# Altium PCB Co1n1oT.PcbDoc (part 1 of 3)
Units mil, origin at the board's own origin, x right, y up, seen from the top; angles counter-clockwise.
Board outline 3740.16 x 2559.06 mil, 4 copper layers (Top Layer, GroundPlane, PowerPlane, Bottom Layer), stack 58.4 mil thick; 129 components, 105 nets, 410 pads, 365 vias.
Unrouted connection lines stored in the file: 18.
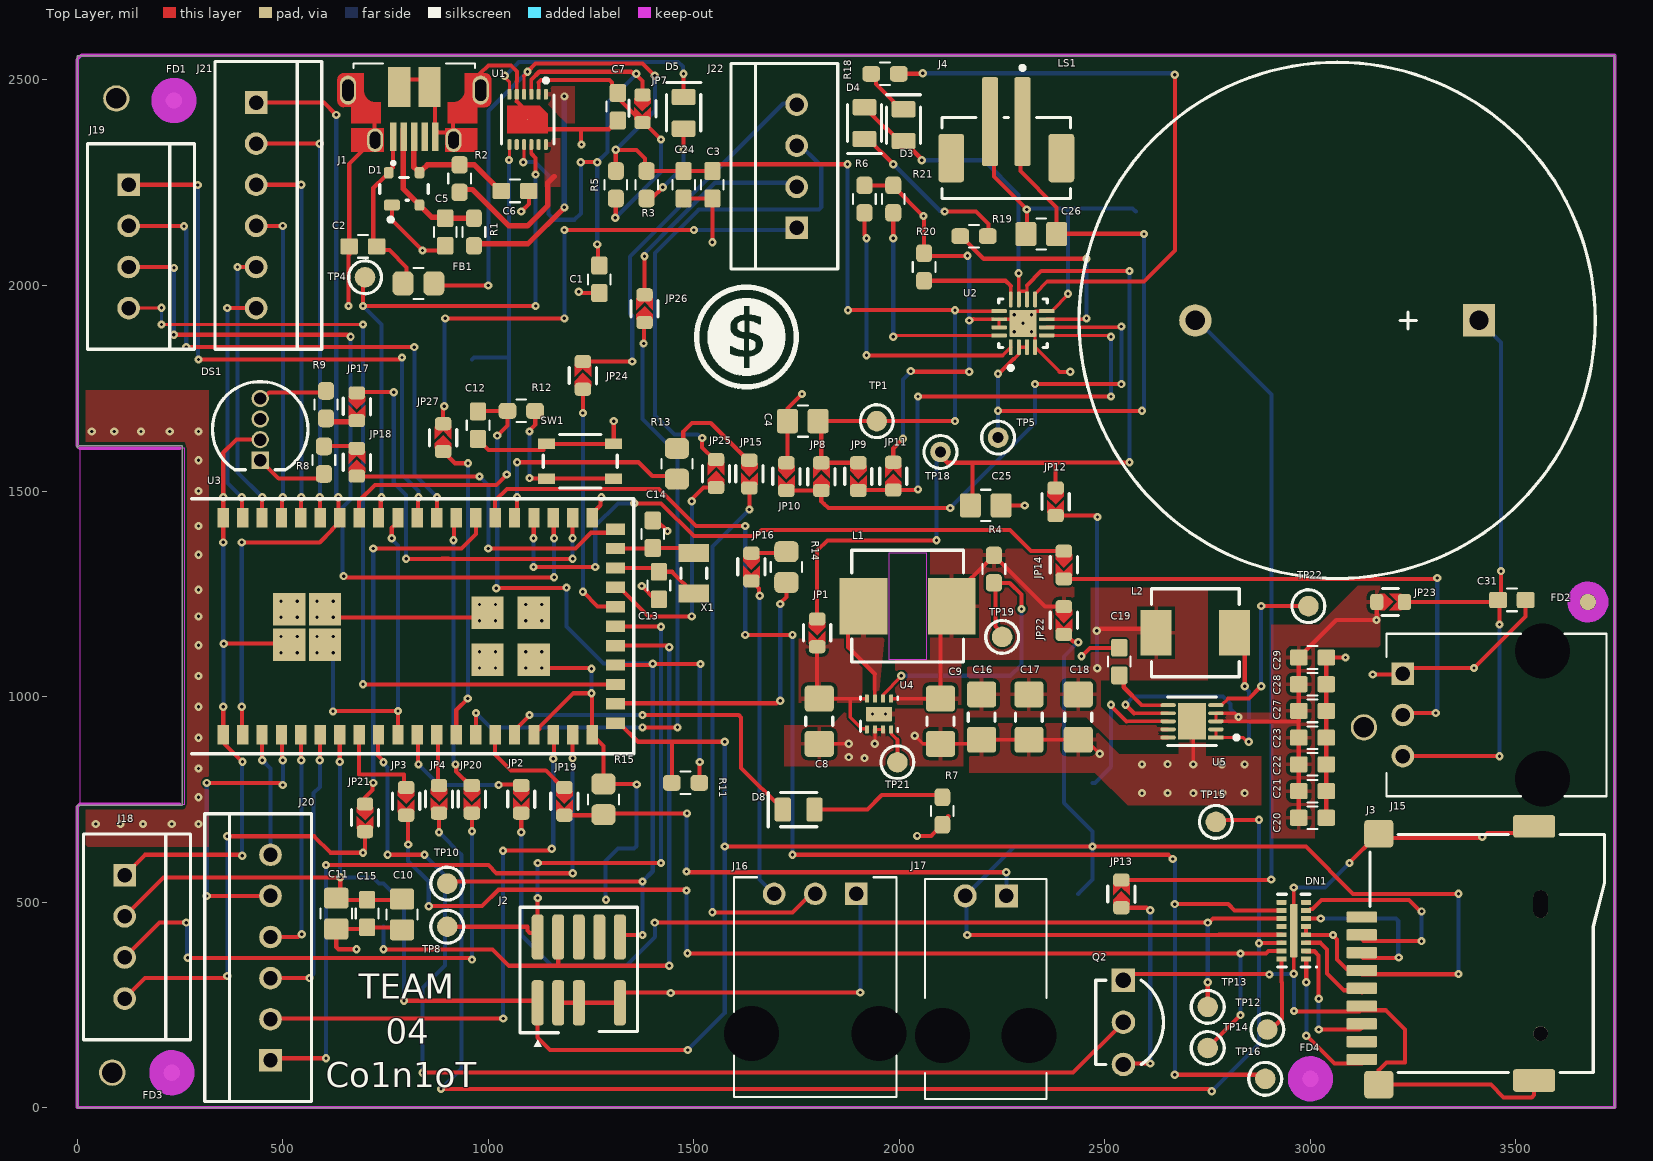
[diagram p0: Top Layer view]
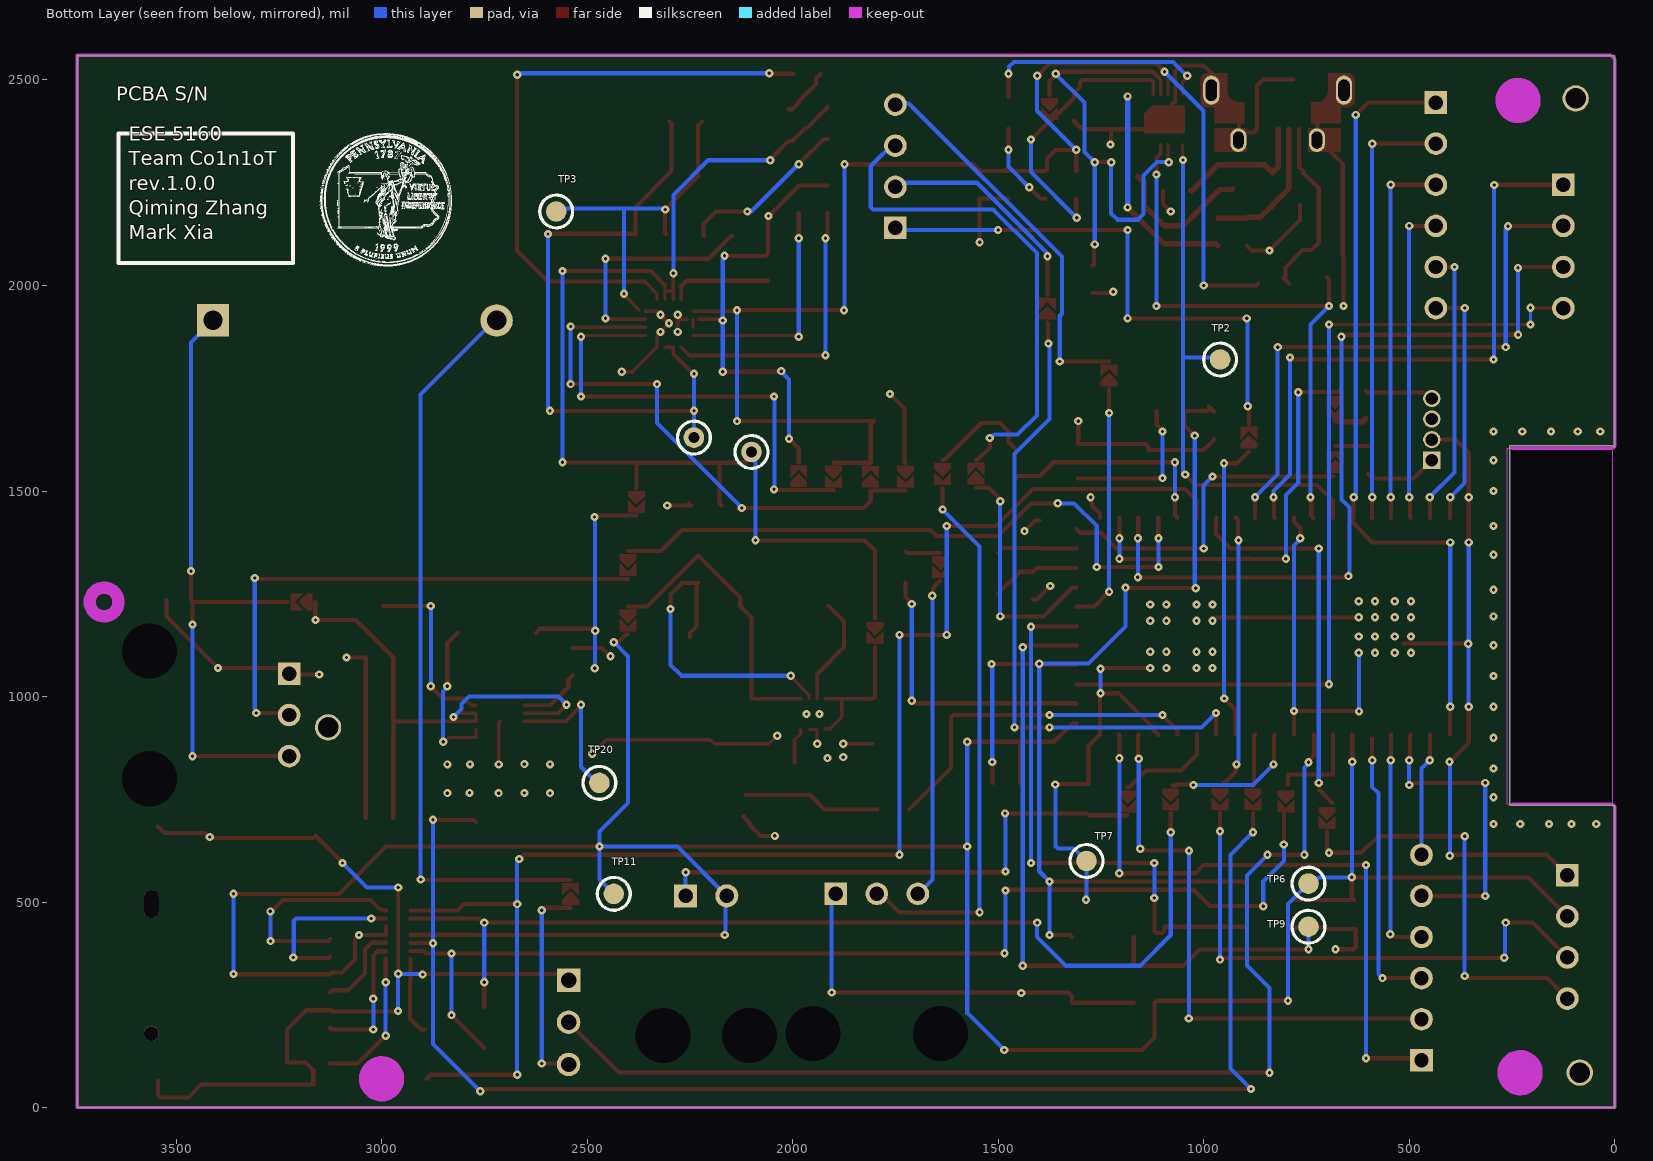
[diagram p1: Bottom Layer view, seen from below]
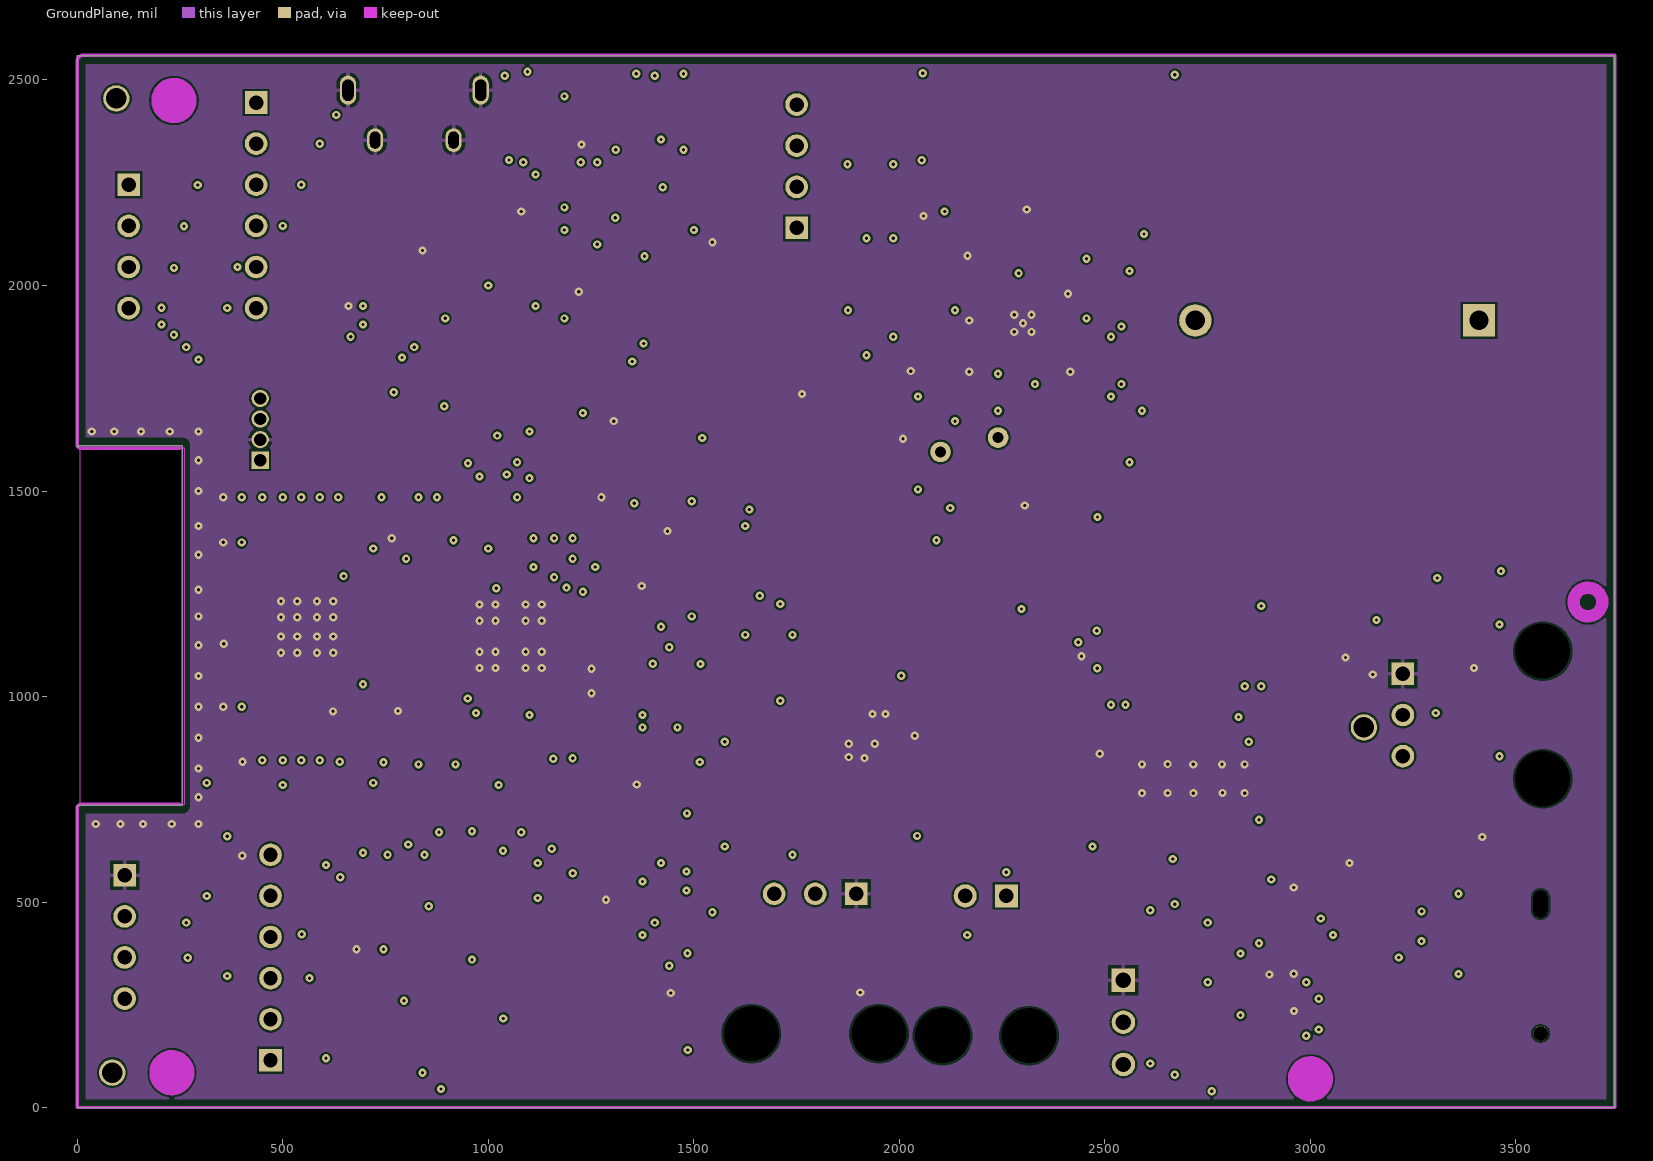
[diagram p2: GroundPlane]
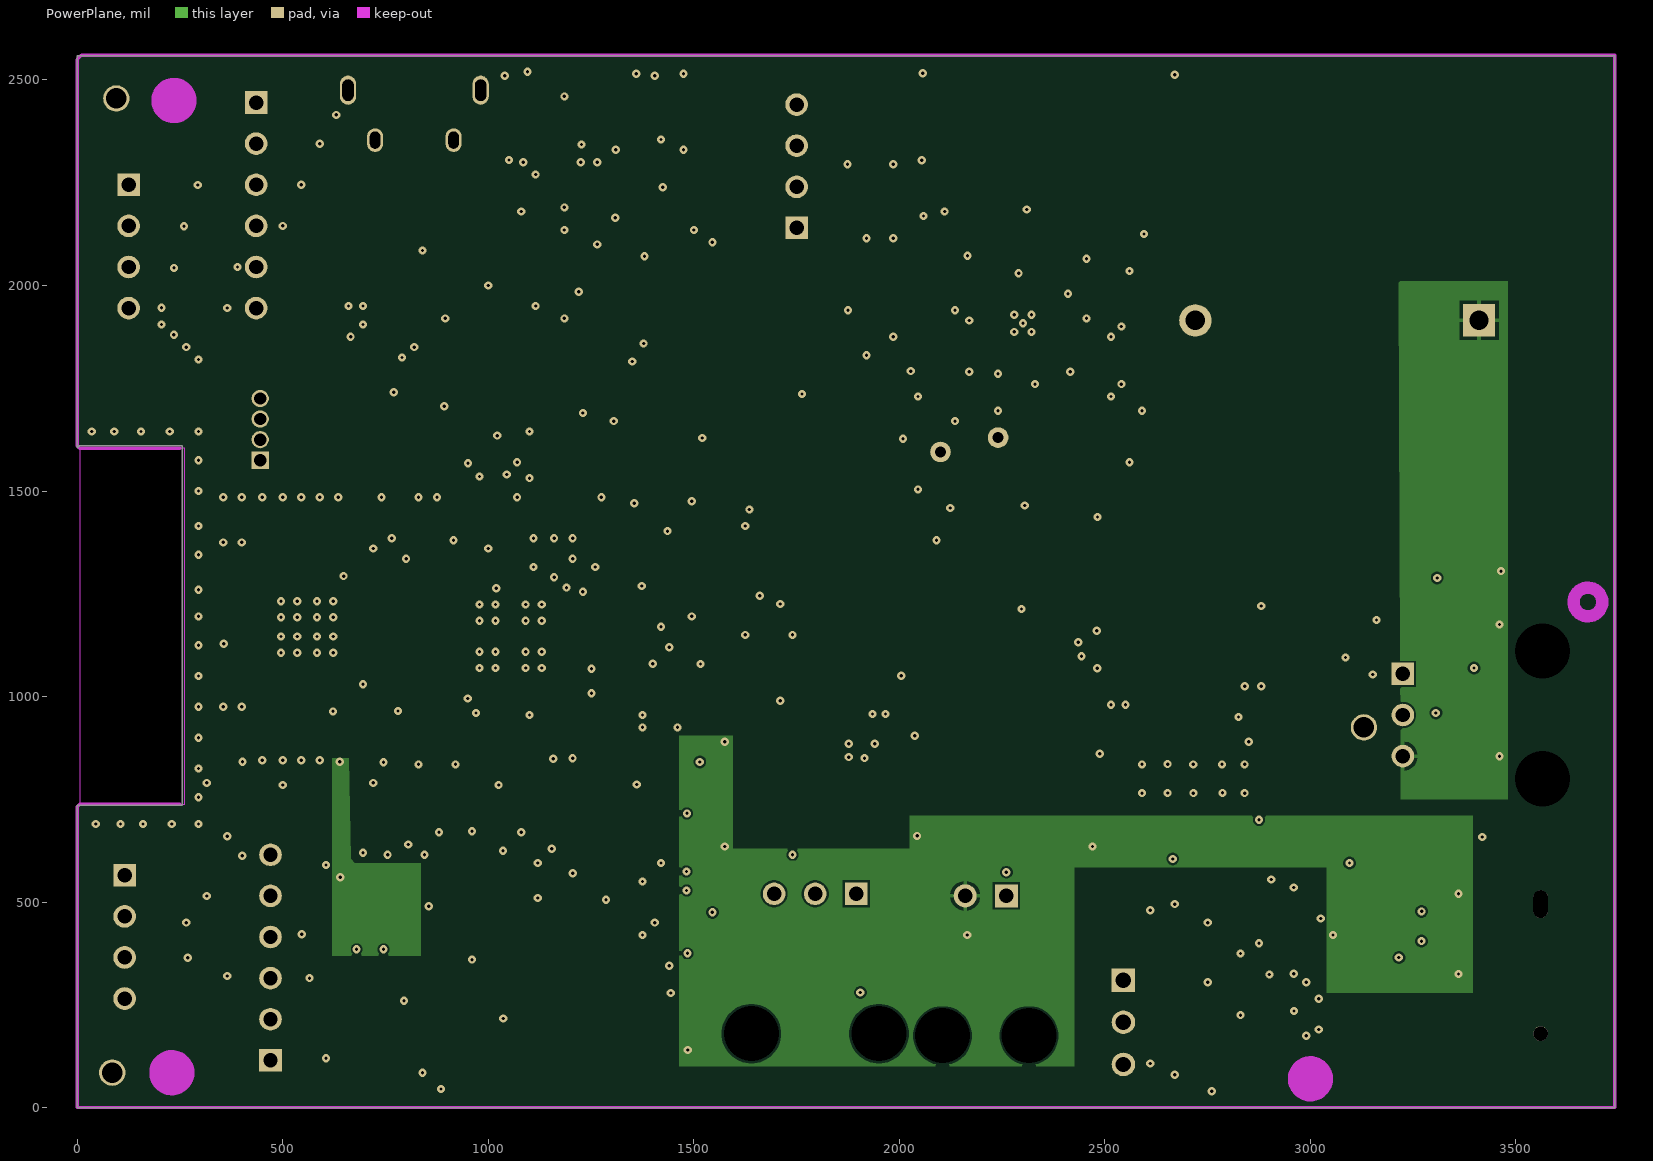
[diagram p3: PowerPlane]
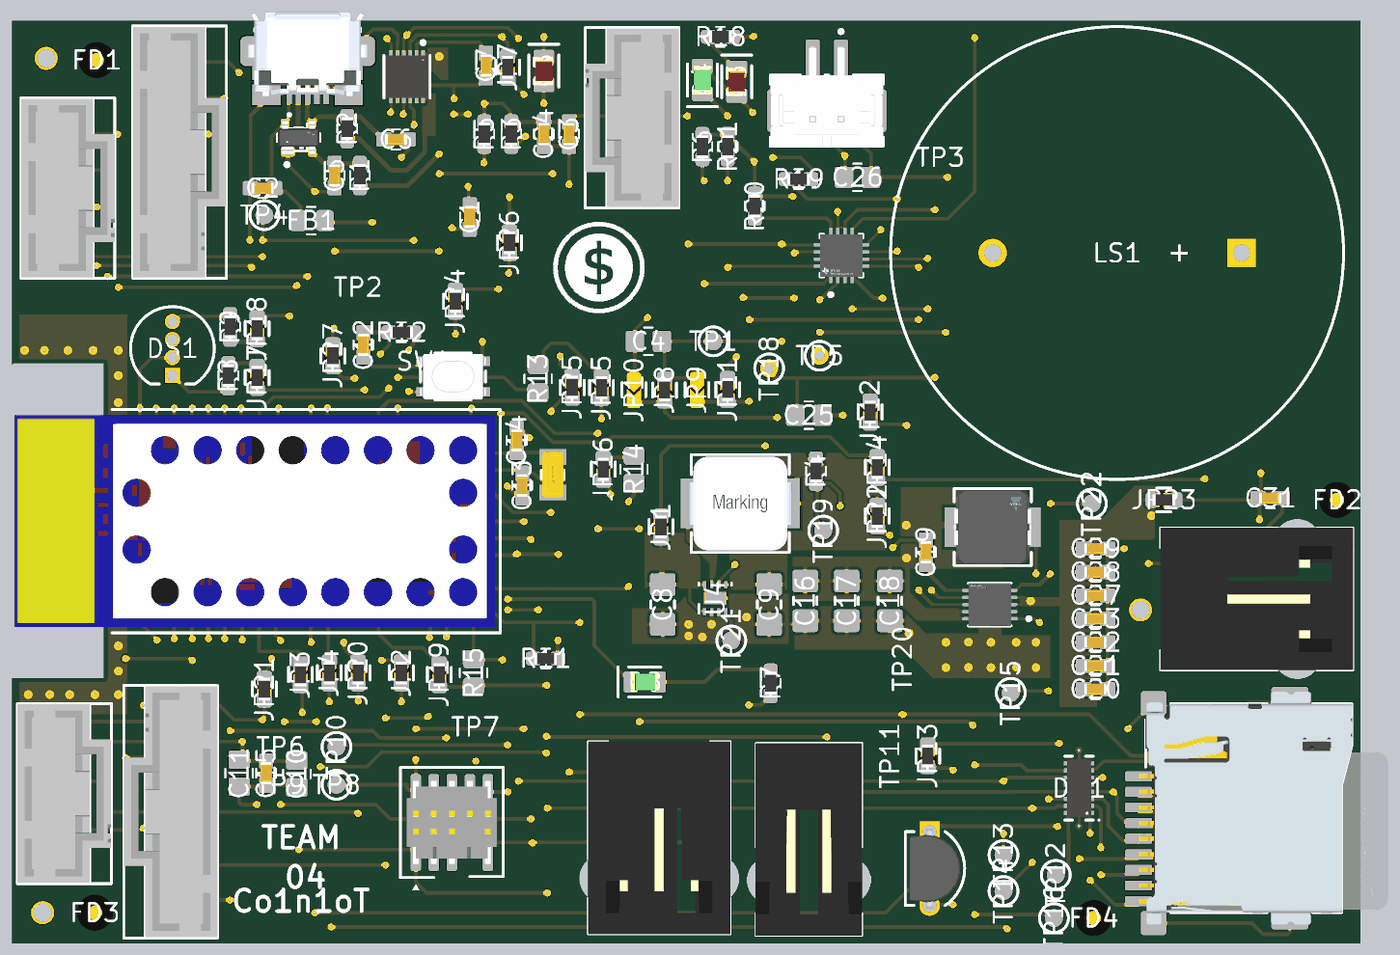
[diagram p5: 3D render of the assembled board from above, using the file's embedded part models]

## Layer stack, top to bottom
Top Solder: solder mask 1, Solder Resist, Dk 3.5
Top Layer: signal copper 1.5
Dielectric1: prepreg 13, PP-006, Dk 4.1
GroundPlane: signal copper 0.7
Dielectric 2: core 28, Core-009, Dk 4.5
PowerPlane: signal copper 0.7
Dielectric 3: prepreg 13, PP-006, Dk 4.1
Bottom Layer: signal copper 1.5
Bottom Solder: solder mask 1, Solder Resist, Dk 3.5

## Board outline
0,1605 5,1610 255,1610 255,735 0,735 0,0 3740.16,0 3740.16,2559.06 0,2559.06

## Design rules (kind name [scope] priority, off if disabled: settings)
AcuteAngle [All] p1: minimum=6.00000000000000E+0001 checktracksonly=TRUE
AssemblyTestPointUsage [All] p1 off: allowmultiple=TRUE
AssemblyTestpoint [All] p1 off: testpointundercomponent=TRUE minsize=30 maxsize=100 preferedsize=60 minholesize=0 maxholesize=40 preferedholesize=32 testpointgrid=1 usegrid=FALSE gridtolerance=0.01 allowsidebottom=TRUE
BoardOutlineClearance "BoardOutlineClearance_Inner Layer" [OnLayer('GroundPlane')OR OnLayer('PowerPlane')] p1: gap=20 ignorepadtopadclearanceinfootprint=FALSE
BoardOutlineClearance BoardOutlineClearance_OuterLayers [All] p2: gap=10 ignorepadtopadclearanceinfootprint=FALSE except(20: SMDPad-OutlineEdge SMDPad-CavityEdge SMDPad-CutoutEdge THPad-OutlineEdge THPad-CavityEdge THPad-CutoutEdge)
Clearance [All] p1: gap=5 ignorepadtopadclearanceinfootprint=FALSE except(10: SMDPad-THPad)
DiffPairsRouting [InDifferentialPairClass('USB')] p1: maxlimit=10 minlimit=6 mostfreqgap=10 toplayer_maxgap=6 toplayer_prefgap=6 toplayer_minwidth=13.15 toplayer_maxwidth=13.15 toplayer_prefwidth=13.15 midlayer1_minwidth=15 midlayer1_maxwidth=15 midlayer1_prefwidth=15 midlayer2_minwidth=15 midlayer2_maxwidth=15 midlayer2_prefwidth=15 bottomlayer_maxgap=6 bottomlayer_prefgap=6 bottomlayer_minwidth=13.15 bottomlayer_maxwidth=13.15 bottomlayer_prefwidth=13.15 impedanceprofiledriven=TRUE maxuncoupledlength=500
FabricationTestPointUsage [All] p1 off: valid=0 allowmultiple=TRUE
FabricationTestpoint [All] p1 off: side=2 testpointundercomponent=TRUE minsize=30 maxsize=100 preferedsize=60 minholesize=0 maxholesize=40 preferedholesize=32 testpointgrid=1 allowsidebottom=TRUE usegrid=FALSE gridtolerance=0.01
HoleSize [All] p1: absolutevalues=TRUE maxlimit=150 minlimit=7.87 maxpercent=80.000 minpercent=20.000
MinimumAnnularRing [All] p1: minimumring=5.91
MinimumSolderMaskSliver [All] p1: minsoldermaskwidth=2
PlaneClearance [All] p1: clearance=10
PlaneConnect [All] p1: pad.planeconnectstyle=Relief pad.reliefexpansion=20 pad.reliefentries=4 pad.reliefconductorwidth=10 pad.reliefairgap=10 via.planeconnectstyle=Direct via.reliefexpansion=20 via.reliefentries=4 via.reliefconductorwidth=10 via.reliefairgap=10
PolygonConnect [All] p1: thpad.connectstyle=Relief thpad.reliefconductorwidth=10 thpad.reliefentries=4 thpad.polygonreliefangle="90 Angle" thpad.airgapwidth=8 smdpad.connectstyle=Relief smdpad.reliefconductorwidth=10 smdpad.reliefentries=4 smdpad.polygonreliefangle="90 Angle" smdpad.airgapwidth=8 via.connectstyle=Direct via.reliefconductorwidth=10 via.reliefentries=4 via.polygonreliefangle="90 Angle" via.airgapwidth=8
RoutingLayers [All] p1: top layer_v5=TRUE mid layer 1_v5=FALSE mid layer 2_v5=FALSE bottom layer_v5=TRUE
RoutingVias [All] p1: holewidth=7.87 width=19.68 viastyle="Through Hole" minholewidth=7.87 minwidth=19.68 maxholewidth=30 maxwidth=50
SMDNeckDown SMDNeckDown_USB [InNet('USB_FTDI_DATA_6_P') or InNet('USB_FTDI_DATA_6_N') or InNet('USB_DATA_N') or InNet('USB_DATA_P')] p1: percent=150.000
SMDNeckDown [All] p2: percent=90.000
SMDToCorner [All] p1: distance=0
SMDToPlane [All] p1: distance=0
SilkToSilkClearance [All] p1: silktosilkclearance=0
SilkToSolderMaskClearance [IsPad] p1: minsilkscreentomaskgap=2 clearancetoexposedcopper=TRUE
SolderMaskExpansion [All] p1: expansion=2 istentingtop=FALSE
UnRoutedNet [All] p1: checkbadconnections=TRUE
ViasUnderSMD [All] p1: allowed=FALSE
Width Width_Power [InNetClass('Power')] p1: maxlimit=50 minlimit=15 preferedwidth=15
Width [All] p2: maxlimit=50 minlimit=5 preferedwidth=10
17 further rules are at their usual default settings.

## Classes and differential pairs
differential pair class USB: USB_DATA USB_FTDI_DATA_5
net class USB: USB_DATA_N USB_DATA_P USB_FTDI_DATA_5_N USB_FTDI_DATA_5_P
component class U_Memory: C15 DN1 J3 TP11 TP12 TP13 TP14 TP15 TP16
component class U_MCU: C10 C11 C12 C13 C14 J2 J20 J21 R11 R12 SW1 TP6 TP7 TP8 TP9 TP10 U3 X1
component class U_LiPo_Charger: C24 C25 C26 D3 D4 JP8 JP9 JP10 JP11 R6 R18 R19 R20 R21 U2
component class U_FTDI: C1 C2 C3 C4 C5 C6 C7 D1 D5 FB1 JP7 R1 R2 R3 R5 U1
component class "TFT LCD 358": J22
component class "RED-GREEN STATUS RGB": DS1 R8 R9
component class Main: C31 D8 FD1 FD2 FD3 FD4 J1 J4 J15 J16 J17 J18 J19 JP1 JP2 JP3 JP4 JP12 JP13 JP14 JP15 JP16 JP17 JP18 JP19 JP20 JP21 JP22 JP23 JP24 JP25 JP26 JP27 LS1 Q2 R7 R13 R14 R15 TP1 TP2 TP3 TP4 TP5 TP18 TP19 TP20 TP21 TP22
component class "5V BOOST": C16 C17 C18 C19 C20 C21 C22 C23 C27 C28 C29 L2 U5
component class "3V3 BUCK": C8 C9 L1 R4 U4
differential pair USB_FTDI_DATA_5: +USB_FTDI_DATA_5_P -USB_FTDI_DATA_5_N
differential pair USB_DATA: +USB_DATA_P -USB_DATA_N

## Components (designator, comment, footprint, x,y, rotation, side; value= is the part's Value field where it differs from the comment)
C1 "0.1UF 16V" 0603_CAP 1270,2015 r90 top value=0.1UF
C2 "0.01uF 16V" 0603_CAP 695,2095 r0 top value=0.01UF
C3 "0.1UF 16V" 0603_CAP 1545,2245 r90 top value=0.1UF
C4 "4.7UF 16V" 0805_CAP 1765,1670 r0 top value=4.7UF
C5 "47pF 50V 5%" 0603_CAP 895,2130 r90 top value=47PF
C6 "47pF 50V 5%" 0603_CAP 1065,2230 r180 top value=47PF
C7 "0.1UF 16V" 0603_CAP 1315,2435 r90 top value=0.1UF
C8 "CAP 1206 10UF 16V 10% X7R" 1206_CAP 1805,940 r90 top value=10UF
C9 "CAP 1206 22UF 10V 10% X7R" 1206_CAP_75H 2100,940 r90 top value=22µF
C10 "10UF 16V" 0805_CAP_60H 790,470 r90 top value=10UF
C11 "10UF 16V" 0805_CAP_60H 630,472 r270 top value=10UF
C12 "1uF 16V" 0603_CAP 975,1660 r90 top value=1UF
C13 "18pF" 0603_CAP 1415,1270 r90 top value=18PF
C14 "18pF" 0603_CAP 1400,1395 r270 top value=18PF
C15 "0.1UF 16V" 0603_CAP 705,472 r90 top value=0.1UF
C16 "CAP 1206 10UF 16V 10% X7R" 1206_CAP 2200,950 r90 top value=10UF
C17 "CAP 1206 10UF 16V 10% X7R" 1206_CAP 2315,950 r90 top value=10UF
C18 "CAP 1206 10UF 16V 10% X7R" 1206_CAP 2435,950 r90 top value=10UF
C19 "CAP 0603 1500PF 50V 10% X7R" 0603_CAP 2535,1085 r270 top value=15nF
C20 "CAP 0603 4.7UF 10V 10% X5R" 0603_CAP 3005,705 r180 top value=4.7UF
C21 "CAP 0603 4.7UF 10V 10% X5R" 0603_CAP 3005,770 r180 top value=4.7UF
C22 "CAP 0603 4.7UF 10V 10% X5R" 0603_CAP 3005,835 r180 top value=4.7UF
C23 "CAP 0603 4.7UF 10V 10% X5R" 0603_CAP 3005,900 r180 top value=4.7UF
C24 "1uF 16V" 0603_CAP 1475,2245 r90 top value=1UF
C25 "4.7UF 16V" 0805_CAP 2210,1465 r180 top value=4.7UF
C26 "4.7UF 16V" 0805_CAP 2345,2125 r0 top value=4.7UF
C27 "CAP 0603 4.7UF 10V 10% X5R" 0603_CAP 3005,965 r180 top value=4.7UF
C28 "CAP 0603 4.7UF 10V 10% X5R" 0603_CAP 3005,1030 r180 top value=4.7UF
C29 "CAP 0603 4.7UF 10V 10% X5R" 0603_CAP 3005,1095 r180 top value=4.7UF
C31 "CAP 0603 10UF 16V 20% X5R" 0603_CAP 3490,1235 r180 top value=10UF
D1 "PRTR5V0U2X,215" FP-SOT143B-NXP 795,2235 r90 top
D3 "LSM0805412V" LED_0805_RED 2010,2390 r270 top
D4 "LSM0805452V" LED_0805 1915,2395 r90 top
D5 "LSM0805412V" LED_0805_RED 1475,2420 r270 top
D8 "LSM0805452V" LED_0805 1755,725 r0 top
DN1 "ECLAMP2410PQTCT" ECLAMP2410PQTCT-Footprint-1 2959.45,430.47 r180 top
DS1 "WP154A4SUREQBFZGC" KING-WP154A4SUREQBFZGC_V 445,1650 r180 top
FB1 "BLM21PG221SN1" 0805 830,2005 r0 top
FD1 "Fiducial 40x100mm" "Fiducial 40x100mm-Footprint-1" 235,2450 r0 top
FD2 "Fiducial 40x100mm" "Fiducial 40x100mm-Footprint-1" 3675,1230 r0 top
FD3 "Fiducial 40x100mm" "Fiducial 40x100mm-Footprint-1" 230,85 r0 top
FD4 "Fiducial 40x100mm" "Fiducial 40x100mm-Footprint-1" 3000,70 r0 top
J1 "10103592-0001LF" 10103592-0001LF-Footprint-1 820,2475 r180 top
J2 "ARM Cortex Debug" "FTSH-105-01-F-DV-007-K PLUGIN" 1220,335 r0 top
J3 "693071020811" 693071020811 3430,375 r90 top
J4 "B2B-PH-SM4-TBT(LF)(SN)" FP-B2B-PH-SM4-TBT_LF_SN-MFG 2260,2310 r180 top
J15 "5-103673-2" 5-103673-2-Footprint-1 3224.84,955.12 r270 top
J16 "5-103673-2" 5-103673-2-Footprint-1 1795.12,520.16 r180 top
J17 "5-103673-1" 5-103672-1-Footprint-1 2210.12,515.16 r180 top
J18 "5-104363-3" 5-104363-3-Footprint-1 115.28,415.28 r270 top
J19 "5-104363-3" 5-104363-3-Footprint-1 125,2095 r270 top
J20 "5-104363-5" 5-104363-5-Footprint-1 470,365 r90 top
J21 "5-104363-5" 5-104363-5-Footprint-1 435,2195 r270 top
J22 "5-104363-3" 5-104363-3-Footprint-1 1750,2290 r90 top
JP1 "0603 link" 0603_JP_RES 1800,1155 r90 top net-tie value=0.025
JP2 "0603 link" 0603_JP_RES 1080,750 r90 top net-tie value=0.025
JP3 "0603 link" 0603_JP_RES 800,745 r90 top net-tie value=0.025
JP4 "0603 link" 0603_JP_RES 880,750 r90 top net-tie value=0.025
JP7 "0603 link" 0603_JP_RES 1375,2430 r90 top net-tie value=0.025
JP8 "0603 link" 0603_JP_RES 1810,1535 r270 top net-tie value=0.025
JP9 "0603 link (Open)" 0603_JP_Open 1900,1535 r90 top value=10000000000meg
JP10 "0603 link (Open)" 0603_JP_Open 1725,1535 r90 top value=10000000000meg
JP11 "0603 link" 0603_JP_RES 1985,1536.25 r270 top net-tie value=0.025
JP12 "0603 link" 0603_JP_RES 2380,1473.75 r90 top net-tie value=0.025
JP13 "0603 link" 0603_JP_RES 2540,520 r270 top net-tie value=0.025
JP14 "0603 link" 0603_JP_RES 2400,1320 r90 top net-tie value=0.025
JP15 "0603 link" 0603_JP_RES 1635,1541.25 r90 top net-tie value=0.025
JP16 "0603 link" 0603_JP_RES 1640,1315 r90 top net-tie value=0.025
JP17 "0603 link" 0603_JP_RES 680,1570 r270 top net-tie value=0.025
JP18 "0603 link" 0603_JP_RES 680,1705 r90 top net-tie value=0.025
JP19 "0603 link" 0603_JP_RES 1185,745 r90 top net-tie value=0.025
JP20 "0603 link" 0603_JP_RES 960,750 r90 top net-tie value=0.025
JP21 "0603 link" 0603_JP_RES 700,705 r90 top net-tie value=0.025
JP22 "0603 link" 0603_JP_RES 2400,1185 r90 top net-tie value=0.025
JP23 "0603 link" 0603_JP_RES 3195,1230 r180 top net-tie value=0.025
JP24 "0603 link" 0603_JP_RES 1230,1781.25 r270 top net-tie value=0.025
JP25 "0603 link" 0603_JP_RES 1553.94,1542.5 r270 top net-tie value=0.025
JP26 "0603 link" 0603_JP_RES 1380,1943.75 r270 top net-tie value=0.025
JP27 "0603 link" 0603_JP_RES 890,1630 r270 top net-tie value=0.025
L1 "74437346010" WE-LHMI_7030 2020,1220 r0 top
L2 "IHLP2020BZER1R0M11" FP-IHLP-2020BZ-FP_1_905x2-MFG 2720,1155 r0 top
LS1 "AST-03208MR-R" AST-03208MR-R 3065,1915 r0 top locked
Q2 "2N4401TF" FP-135AR-MFG 2559.96,207.36 r0 top
R1 "RES 0603 27 1%" 0603_RES 965,2130 r270 top value=27
R2 "RES 0603 27 1%" 0603_RES 930,2260 r270 top value=27
R3 "RES 0603 1K 1%" 0603_RES 1385,2245 r270 top value=1k
R4 "RES 0603 178K 1%" 0603_RES 2230,1310 r270 top value=178k
R5 "RES 0603 1K 1%" 0603_RES 1310,2245 r270 top value=1k
R6 "RES 0603 1K 1%" 0603_RES 1915,2210 r270 top value=1k
R7 "RES 0603 1K 1%" 0603_RES 2104.43,721.54 r270 top value=1k
R8 "RES 0603 1K 1%" 0603_RES 600,1575 r90 top value=1k
R9 "RES 0603 1K 1%" 0603_RES 605,1710 r270 top value=1k
R11 "RES 0603 10K 1%" 0603_RES 1480,790 r180 top value=10k
R12 "RES 0603 100 1%" 0603_RES 1080,1695 r180 top value=100
R13 "RES 0805 470 1%" 0805_RES 1458.94,1566.25 r90 top value=470
R14 "RES 0805 470 1%" 0805_RES 1725,1315 r90 top value=470
R15 "RES 0805 47.5K 0.1%" 0805_RES 1280,750 r90 top value=47.5k
R18 "RES 0603 1K 1%" 0603_RES 1965,2515 r180 top value=1k
R19 "RES 0603 1K 1%" 0603_RES 2181.54,2120 r0 top value=1k
R20 "RES 0603 1.13K 1%" 0603_RES 2060,2045 r270 top value=1.13k
R21 "RES 0603 1.13K 1%" 0603_RES 1985,2210 r90 top value=1.13k
SW1 "PTS810SJK250SMTRLFS" PTS810SJK250SMTRLFS-Footprint-1 1141.61,1614.65 r0 top
TP1 "Testpad" "SMT Testpoint, 50mil" 1945,1670 r0 top
TP2 "Testpad" "SMT Testpoint, 50mil" 960,1820 r180 bottom
TP3 "Testpad" "SMT Testpoint, 50mil" 2575,2180 r180 bottom
TP4 "Testpad" "SMT Testpoint, 50mil" 700,2020 r0 top
TP5 "Testpad" "Test PTH 27-50" 2240,1630 r0 top
TP6 "Testpad" "SMT Testpoint, 50mil" 745,545 r180 bottom
TP7 "Testpad" "SMT Testpoint, 50mil" 1285,600 r180 bottom
TP8 "Testpad" "SMT Testpoint, 50mil" 900,440 r0 top
TP9 "Testpad" "SMT Testpoint, 50mil" 745,440 r180 bottom
TP10 "Testpad" "SMT Testpoint, 50mil" 900,545 r90 top locked
TP11 "Testpad" "SMT Testpoint, 50mil" 2435,520 r90 bottom
TP12 "Testpad" "SMT Testpoint, 50mil" 2895,190 r90 top
TP13 "Testpad" "SMT Testpoint, 50mil" 2750,245 r90 top
TP14 "Testpad" "SMT Testpoint, 50mil" 2750,145 r90 top
TP15 "Testpad" "SMT Testpoint, 50mil" 2770,695 r90 top
TP16 "Testpad" "SMT Testpoint, 50mil" 2890,70 r90 top
TP18 "Testpad" "Test PTH 27-50" 2100,1595 r90 top
TP19 "Testpad" "SMT Testpoint, 50mil" 2250,1145 r90 top
TP20 "Testpad" "SMT Testpoint, 50mil" 2470,790 r90 bottom
TP21 "Testpad" "SMT Testpoint, 50mil" 1995,840 r90 top
TP22 "Testpad" "SMT Testpoint, 50mil" 2995,1220 r90 top
U1 "FT234XD-R" FP-DFN-12-MFG 1095.71,2403.98 r270 top
U2 "BQ24075RGTR" FP-RGT0016C-IPC_A 2300.47,1907.99 r90 top
U3 "ATSAMW25H18-MR210" ATSAMW25H18-MR210-Footprint-1 803.83,1171.07 r90 top locked
U4 "TPS62082DSGR" DSG0008A_V 1950.47,957.4 r90 top
U5 "TPS61232DRCR" FP-DRC0010G-IPC_A 2711.81,939.68 r180 top
X1 "ABS07-32.768KHZ-T" FP-ABS07-MFG 1500,1300 r90 top

## Footprints (in the part's own frame and the unit in brackets; to place one, negate y for a bottom-side part, rotate by r counter-clockwise, add the part's x,y. Pads: shape width x height; smd on the part's side, far side on the other; paste and mask are expansions set on the pad)
5-103672-1-Footprint-1 [mil]
  rect 56x56 hole 35: 1(-50,0)
  round 56 hole 35: 2(50,0)
  round 0 hole 133.86 unplated mask+4: MH(-105.12,340.16) MH(105.12,340.16)
  silkscreen extent -147,-41 147,494, body extent -147,-41 147,494, height 260
5-103673-2-Footprint-1 [mm]
  rect 1.398x1.398 hole 0.89: 1(-2.54,0)
  round 1.398 hole 0.89: 2(0,0) 3(2.54,0)
  round 0 hole 3.4 unplated mask+0.102: MH(-3.94,8.64) MH(3.94,8.64)
  silkscreen extent -5.02,-1.02 5.02,12.57, body extent -5.02,-1.02 5.01,12.57, height 6.6
5-104363-3-Footprint-1 [mm]
  rect 1.398x1.398 hole 0.89: 1(-3.81,0)
  round 1.398 hole 0.89: 2(-1.27,0) 3(1.27,0) 4(3.81,0)
  silkscreen extent -6.35,-2.54 6.35,4.06, body extent -6.29,-2.54 6.29,4.06, height 13.59
5-104363-5-Footprint-1 [mm]
  rect 1.398x1.398 hole 0.89: 1(-6.35,0)
  round 1.398 hole 0.89: 2(-3.81,0) 3(-1.27,0) 4(1.27,0) 5(3.81,0) 6(6.35,0)
  silkscreen extent -8.89,-2.54 8.89,4.06, body extent -8.83,-2.54 8.83,4.06, height 13.59
0603_CAP [mm]
  rrect25% 1.1x1 smd: 1(-0.85,0) 2(0.85,0)
  silkscreen extent -0.3,-0.7 0.3,0.7, body extent -0.8,-0.4 0.8,0.4, height 0.6
0603_JP_Open [mil] "Jumper (Open/DNP)"
  rrect50% 32x40 smd paste-999: 1(33.75,0) 2(-33.75,0)
  Top Layer region: -26.25,0 -16.25,0 3.75,-20 -25.75,-20
  Top Layer region: -26.25,0 -16.25,0 3.75,20 -26.25,20
  Top Layer region: 26,20 13.75,20 -6.25,0 13.75,-20 26,-20
  silkscreen extent -19,-33 20,33
0603_JP_RES [mil] "Jumper (Resistor)"
  rrect50% 32x40 smd paste+1.5: 1(33.75,0) 2(-33.75,0)
  Top Layer region: -26.25,0 -16.25,0 3.75,-20 -25.75,-20
  Top Layer region: -26.25,0 -16.25,0 3.75,20 -26.25,20
  Top Layer region: 26,20 13.75,20 -6.25,0 13.75,-20 26,-20
  silkscreen extent -19,-33 20,33, body extent -31,-16 31,16, height 24
0603_RES [mil]
  rrect50% 43x39 smd: 1(-33.46,0) 2(33.46,0)
  silkscreen extent -12,-28 12,28, body extent -31,-16 32,16, height 24
0805 [mm] "Body 2.0 x 1.2 mm (LxW typ)"
  rrect50% 1.3x1.5 smd: 1(-0.95,0) 2(0.95,0)
  silkscreen extent -0.3,-0.97 0.3,0.97, body extent -1.15,-0.72 1.15,0.72, height 1.1
0805_CAP [mm]
  rrect25% 1.3x1.5 smd: 1(-0.95,0) 2(0.95,0)
  silkscreen extent -0.3,-0.97 0.3,0.97, body extent -1,-0.65 1,0.66, height 1.52
0805_CAP_60H [mm]
  rrect25% 1.3x1.5 smd: 1(-0.95,0) 2(0.95,0)
  silkscreen extent -0.3,-0.97 0.3,0.97, body extent -1,-0.65 1,0.66, height 1.52
0805_RES [mm]
  rrect50% 1.3x1.5 smd: 1(-0.95,0) 2(0.95,0)
  silkscreen extent -0.3,-0.97 0.3,0.97, body extent -1.09,-0.7 1.09,0.7, height 1.1
1206_CAP [mm]
  rrect25% 1.6x1.8 smd: 1(-1.4,0) 2(1.4,0)
  silkscreen extent -0.25,-0.83 0.25,0.83, body extent -1.6,-0.83 1.6,0.83, height 1.91
1206_CAP_75H [mm]
  rrect25% 1.6x1.8 smd: 1(-1.4,0) 2(1.4,0)
  silkscreen extent -0.25,-0.83 0.25,0.83, body extent -1.6,-0.83 1.6,0.83, height 1.91
10103592-0001LF-Footprint-1 [mm]
  rect 0.4x1.75 smd: 1(1.3,2.875) 2(0.65,2.875) 3(0,2.875) 4(-0.65,2.875) 5(-1.3,2.875)
  oval 1x1.8 hole 0.7 slot 1.326 at 90 deg: S1(-4.1,0) S3(4.1,0)
  oval 1x1.46 hole 0.65 slot 1.05 at 90 deg: S2(-2.425,3.08) S4(2.425,3.08)
  rect 1.375x2.5 smd: S5(-0.937,-0.2) S6(0.937,-0.2)
  Top Layer region: 3.9,2.35 1.9,2.35 1.9,3.81 3.9,3.81
  Top Layer region: 3.9,1.05 4.35,1.05 4.371,1.049 4.392,1.048 4.413,1.045 4.433,1.041 4.454,1.036 4.474,1.03 4.493,1.023 4.513,1.015 4.532,1.006 4.55,0.996 4.568,0.985 4.585,0.974 4.602,0.961 4.618,0.947 4.633,0.933 4.647,0.918 4.661,0.902 4.674,0.885 4.685,0.868 4.696,0.85 4.706,0.832 4.715,0.813 4.723,0.793 4.73,0.774 4.736,0.754 4.741,0.733 4.745,0.713 4.748,0.692 4.749,0.671 4.75,0.65 4.75,-0.65 4.749,-0.671 4.748,-0.692 4.745,-0.713 4.741,-0.733 4.736,-0.754 4.73,-0.774 4.723,-0.793 4.715,-0.813 4.706,-0.832 4.696,-0.85 4.685,-0.868 4.674,-0.885 4.661,-0.902 4.647,-0.918 4.633,-0.933 4.618,-0.947 4.602,-0.961 4.585,-0.974 4.568,-0.985 4.55,-0.996 4.532,-1.006 4.513,-1.015 4.493,-1.023 4.474,-1.03 4.454,-1.036 4.433,-1.041 4.413,-1.045 4.392,-1.048 4.371,-1.049 4.35,-1.05 3.125,-1.05 3.125,0 3.124,0.039 3.121,0.078 3.116,0.117 3.109,0.156 3.099,0.194 3.088,0.232 3.075,0.269 3.06,0.305 3.043,0.34 3.025,0.375 3.004,0.408 2.982,0.441 2.958,0.472 2.932,0.502 2.905,0.53 2.877,0.557 2.847,0.583 2.816,0.607 2.783,0.629 2.75,0.65 2.715,0.668 2.68,0.685 2.644,0.7 2.607,0.713 2.569,0.724 2.531,0.734 2.492,0.741 2.453,0.746 2.414,0.749 2.375,0.75 2.075,0.75 2.075,2.032 3.9,2.032
  Top Layer region: -1.9,2.35 -3.9,2.35 -3.9,3.81 -1.9,3.81
  Top Layer region: -2.075,0.75 -2.375,0.75 -2.414,0.749 -2.453,0.746 -2.492,0.741 -2.531,0.734 -2.569,0.724 -2.607,0.713 -2.644,0.7 -2.68,0.685 -2.715,0.668 -2.75,0.65 -2.783,0.629 -2.816,0.607 -2.847,0.583 -2.877,0.557 -2.905,0.53 -2.932,0.502 -2.958,0.472 -2.982,0.441 -3.004,0.408 -3.025,0.375 -3.043,0.34 -3.06,0.305 -3.075,0.269 -3.088,0.232 -3.099,0.194 -3.109,0.156 -3.116,0.117 -3.121,0.078 -3.124,0.039 -3.125,0 -3.125,-1.05 -4.35,-1.05 -4.371,-1.049 -4.392,-1.048 -4.413,-1.045 -4.433,-1.041 -4.454,-1.036 -4.474,-1.03 -4.493,-1.023 -4.513,-1.015 -4.532,-1.006 -4.55,-0.996 -4.568,-0.985 -4.585,-0.974 -4.602,-0.961 -4.618,-0.947 -4.633,-0.933 -4.647,-0.918 -4.661,-0.902 -4.674,-0.885 -4.685,-0.868 -4.696,-0.85 -4.706,-0.832 -4.715,-0.813 -4.723,-0.793 -4.73,-0.774 -4.736,-0.754 -4.741,-0.733 -4.745,-0.713 -4.748,-0.692 -4.749,-0.671 -4.75,-0.65 -4.75,0.65 -4.749,0.671 -4.748,0.692 -4.745,0.713 -4.741,0.733 -4.736,0.754 -4.73,0.774 -4.723,0.793 -4.715,0.813 -4.706,0.832 -4.696,0.85 -4.685,0.868 -4.674,0.885 -4.661,0.902 -4.647,0.918 -4.633,0.933 -4.618,0.947 -4.602,0.961 -4.585,0.974 -4.568,0.985 -4.55,0.996 -4.532,1.006 -4.513,1.015 -4.493,1.023 -4.474,1.03 -4.454,1.036 -4.433,1.041 -4.413,1.045 -4.392,1.048 -4.371,1.049 -4.35,1.05 -3.9,1.05 -3.9,2.032 -2.075,2.032
  silkscreen extent -3.75,-1.65 3.75,4.6, body extent -4.25,-2.75 4.25,3.23, height 2.77
693071020811 [mm] "Micro SD Card Connector Push & Push - with Card Detection - 8 Pins"
  rrect25% 0.7x1.9 smd: 1(2.25,7.75) 2(1.15,7.75) 3(0.05,7.75) 4(-1.05,7.75) 5(-2.15,7.75) 6(-3.25,7.75) 7(-4.35,7.75) 8(-5.45,7.75) 9(-6.55,7.75)
  rrect25% 1.7x1.8 smd: 10(-8.1,6.7) 11(7.4,6.7)
  rrect25% 1.4x2.6 smd: 12(-7.85,-2.9) 13(7.85,-2.9)
  round 0.9 hole 0.9 unplated: MH1(-4.95,-3.3)
  oval 1.7x0.9 hole 0.9 slot 1.7 at 0 deg unplated: MH2(3.05,-3.3)
  silkscreen extent -7.35,-7.25 7.35,7.25, body extent -8.2,-9.8 8.2,7.73, height 1.85
AST-03208MR-R [mm]
  rect 2x2 hole 1.2: 1(8.765,0)
  round 2 hole 1.2: 2(-8.765,0)
  silkscreen extent -15.95,-15.95 15.95,15.95, body extent -15.95,-15.95 16.78,15.95, height 14.12
ATSAMW25H18-MR210-Footprint-1 [mm]
  rect 1.2x0.7 smd mask+0.05: 1(-6.696,11.4) 2(-6.696,10.2) 3(-6.696,9) 4(-6.696,7.8) 5(-6.696,6.6) 6(-6.696,5.4) 7(-6.696,4.2) 8(-6.696,3) 9(-6.696,1.8) 10(-6.696,0.6) 11(-6.696,-0.6) 12(-6.696,-1.8) 13(-6.696,-3) 14(-6.696,-4.2) 15(-6.696,-5.4) 16(-6.696,-6.6) 17(-6.696,-7.8) 18(-6.696,-9) 19(-6.696,-10.2) 20(-6.696,-11.4) 32(6.704,-11.4) 33(6.704,-10.2) 34(6.704,-9) 35(6.704,-7.8) 36(6.704,-6.6) 37(6.704,-5.4) 38(6.704,-4.2) 39(6.704,-3) 40(6.704,-1.8) 41(6.704,-0.6) 42(6.704,0.6) 43(6.704,1.8) 44(6.704,3) 45(6.704,4.2) 46(6.704,5.4) 47(6.704,6.6) 48(6.704,7.8) 49(6.704,9) 50(6.704,10.2) 51(6.704,11.4)
  rect 0.7x1.2 smd mask+0.05: 21(-6,-12.841) 22(-4.8,-12.841) 23(-3.6,-12.841) 24(-2.4,-12.841) 25(-1.2,-12.841) 26(0,-12.841) 27(1.2,-12.841) 28(2.4,-12.841) 29(3.6,-12.841) 30(4.8,-12.841) 31(6,-12.841)
  rect 2x2 smd mask+0.05: EP(-2.082,-7.786) EP(-2.082,-4.931) EP(-1.134,5.107) EP(-1.134,7.325) EP(0.842,-4.931) EP(0.842,-7.786) EP(1.048,5.107) EP(1.048,7.325)
  Keep-Out Layer region: -11,13.775 11,13.775 11,20.275 -11,20.275
  silkscreen extent -7.87,-13.97 7.87,13.36, body extent -7.45,-13.6 7.45,20.26, height 3.37
DSG0008A_V [mm] "SON, 8-Leads, Body 2x2mm, Pitch 0.5mm, Thermal Pad 1.6x0.9mm, TI Recommended"
  rrect40% 0.5x0.25 smd: 1(-0.95,0.75) 2(-0.95,0.25) 3(-0.95,-0.25) 4(-0.95,-0.75) 5(0.95,-0.75) 6(0.95,-0.25) 7(0.95,0.25) 8(0.95,0.75)
  rrect11% 0.9x1.6 smd paste-0.45: 9(0,0)
  silkscreen extent -1.07,-1.15 1.07,1.15, body extent -1.05,-1.05 1.05,1.05, height 0.8
ECLAMP2410PQTCT-Footprint-1 [mm]
  rrect20% 0.63x0.3 smd mask+0: 1(-0.76,1.75) 2(-0.76,1.25) 3(-0.76,0.75) 4(-0.76,0.25) 5(-0.76,-0.25) 6(-0.76,-0.75) 7(-0.76,-1.25) 8(-0.76,-1.75) 9(0.76,-1.75) 10(0.76,-1.25) 11(0.76,-0.75) 12(0.76,-0.25) 13(0.76,0.25) 14(0.76,0.75) 15(0.76,1.25) 16(0.76,1.75)
  rrect20% 0.45x3.3 smd mask+0: EP(0,0)
  Top Layer lines w0.2: 0,2.667 0,0 0,-2.667
  silkscreen extent -1.45,-2.25 1,2.3, body extent -0.85,-2.05 0.85,2.05, height 0.65
"Fiducial 40x100mm-Footprint-1" [mil]
  round 40 smd paste-30 mask+30: 0(0,0)
  Keep-Out Layer circle w55: c0,0 r27.5
FP-135AR-MFG [mm]
  rect 1.45x1.45 hole 0.95 paste-1000 mask+0: 1(-0.38,2.6)
  round 1.45 hole 0.95 paste-1000 mask+0: 2(-0.38,0) 3(-0.38,-2.6)
  silkscreen extent -2.09,-2.6 2.09,2.6, body extent -2.19,-3.42 2.19,3.42, height 0.25
FP-ABS07-MFG [mm]
  rect 1.1x1.9 smd paste+0 mask+0: 1(-1.25,0) 2(1.25,0)
  silkscreen extent -0.33,-0.8 0.33,0.8, body extent -1.9,-1.05 1.9,1.05, height 0.25
FP-B2B-PH-SM4-TBT_LF_SN-MFG [mm]
  rrect25% 1x5.5 smd: 1(-1,-2.25) 2(1,-2.25)
  rrect25% 1.6x3 smd: S1(-3.4,0) S2(3.4,0)
  silkscreen extent -3.98,-5.7 3.98,2.5, body extent -3.98,-4.5 3.98,2.5, height 6.6
FP-DFN-12-MFG [mm]
  rrect50% 0.65x0.25 smd paste-0.025 mask+0: 1(-1.55,1.125) 2(-1.55,0.675) 3(-1.55,0.225) 4(-1.55,-0.225) 5(-1.55,-0.675) 6(-1.55,-1.125) 7(1.55,-1.125) 8(1.55,-0.675) 9(1.55,-0.225) 10(1.55,0.225) 11(1.55,0.675) 12(1.55,1.125)
  round 0.025 smd paste-0.05 mask+0: 13(0,0)
  Top Layer region: 0.85,-1.25 -0.85,-1.25 -0.85,0.74 -0.34,1.25 0.85,1.25
  silkscreen extent -2.52,-1.63 1.5,1.63, body extent -1.5,-1.5 1.5,1.5, height 0.81
FP-DRC0010G-IPC_A [mm]
  rect 0.956x0.239 smd paste+0 mask+0: 1(-1.478,1)
  rrect100% 0.956x0.239 smd paste+0 mask+0: 2(-1.478,0.5) 3(-1.478,0) 4(-1.478,-0.5) 5(-1.478,-1) 6(1.478,-1) 7(1.478,-0.5) 8(1.478,0) 9(1.478,0.5) 10(1.478,1)
  rect 1.7x2.25 smd paste-1000 mask+0: 11(0,0)
  silkscreen extent -2.88,-1.5 1.5,1.5, body extent -2.46,-2 2.46,2, height 0.25
FP-IHLP-2020BZ-FP_1_905x2-MFG [mm]
  rect 1.905x2.79 smd paste+0 mask+0: 1(-2.425,0) 2(2.425,0)
  silkscreen extent -2.72,-2.72 2.72,2.72, body extent -3.48,-2.82 3.48,2.82, height 0.25
FP-RGT0016C-IPC_A [mm]
  rrect50% 0.966x0.239 smd paste+0 mask+0: 1(-1.473,0.75) 2(-1.473,0.25) 3(-1.473,-0.25) 4(-1.473,-0.75) 9(1.473,-0.75) 10(1.473,-0.25) 11(1.473,0.25) 12(1.473,0.75)
  rrect50% 0.239x0.966 smd paste+0 mask+0: 5(-0.75,-1.473) 6(-0.25,-1.473) 7(0.25,-1.473) 8(0.75,-1.473) 13(0.75,1.473) 14(0.25,1.473) 15(-0.25,1.473) 16(-0.75,1.473)
  rrect6% 1.664x1.664 smd paste-1000 mask+0: EP(0,0)
  silkscreen extent -2.88,-1.5 1.5,1.5, body extent -2.46,-2.46 2.46,2.46, height 0.25
FP-SOT143B-NXP [mm]
  rrect50% 0.7x1 smd paste-0.1: 1(-1,0.75)
  rrect50% 0.7x0.6 smd paste-0.1: 2(-1,-0.95) 3(1,-0.95) 4(1,0.95)
  silkscreen extent -2.02,-1.5 0.7,1.5, body extent -1.16,-1.45 1.16,1.45, height 1.1
"FTSH-105-01-F-DV-007-K PLUGIN" [mil]
  rrect50% 29.13x109.84 smd: 1(-100,-80) 2(-100,80) 3(-50,-80) 4(-50,80) 5(0,-80) 6(0,80) 8(50,80) 9(100,-80) 10(100,80)
  silkscreen extent -143,-187 143,153, body extent -208,-310 207,115, height 315
KING-WP154A4SUREQBFZGC_V [mm] "THD, 4-Leads, Dia 5.9mm, Pitch 1.27mm"
  rect 1.07x1.07 hole 0.762 paste+0: 1(0,1.905)
  round 1.07 hole 0.762 paste+0: 2(0,0.635) 3(0,-0.635) 4(0,-1.905)
  silkscreen extent -2.95,-2.95 2.95,2.5
LED_0805 [mm] "Molded Diode, 2-Leads, Body 2.00x1.25mm, IPC Medium Density"
  rrect25% 1.01x1.47 smd: A(0.98,0) K(-0.98,0)
  silkscreen extent -1.88,-1.05 1.13,1.05, body extent -1,-0.62 1,0.62, height 1.12
LED_0805_RED [mm] "Molded Diode, 2-Leads, Body 2.00x1.25mm, IPC Medium Density"
  rrect25% 1.01x1.47 smd: A(0.98,0) K(-0.98,0)
  silkscreen extent -1.88,-1.05 1.13,1.05, body extent -1,-0.62 1,0.62, height 1.12
PTS810SJK250SMTRLFS-Footprint-1 [mm]
  rect 1.05x0.65 smd: 1(0,0) 2(4.15,0) 3(0,-2.15) 4(4.15,-2.15)
  silkscreen extent -0.21,-2.73 4.36,0.58, body extent -0.22,-2.67 4.38,0.53, height 2.5
"SMT Testpoint, 50mil" [mil]
  round 50 smd: 1(0,0)
  silkscreen extent -40,-40 40,40
"Test PTH 27-50" [mil]
  round 50 hole 27 paste-99999: 1(0,0)
  silkscreen extent -40,-40 40,40
WE-LHMI_7030 [mm] "SMT Power Inductor, 2-Leads, body 6.6x6.6mm"
  rect 2.95x3.5 smd: 1(-2.725,0) 2(2.725,0)
  Top Layer keep-out region: -1.15,3.3 1.15,3.3 1.15,-3.3 -1.15,-3.3
  silkscreen extent -3.45,-3.45 3.45,3.45, body extent -3.65,-3.3 3.65,3.3, height 2.8

## Part data
C1 C3 C7 C15: library part CMP-011-000221-1, "Capacitor Surface Mount 0603 Footprint 0.1UF 16V 10% Tolerance Ceramic X7R", Manufacturer=Various, Manufacturer P/N="CAP 0603 0.1UF 16V 10% X7R", PCB Package=0603, Tolerance=10%, Voltage=16V, Description in Visual="Cap SMT 0603 0.1UF 16V 10%  Cer X7R", Mount=SMT, P/N="CAP 0603 0.1UF 16V 10% X7R", Type="Ceramic X7R"
C2: library part CMP-011-000185-1, "Capacitor Surface Mount 0603 Footprint 0.01UF 16V 10% Tolerance Ceramic X7R", Manufacturer=Various, Manufacturer P/N="CAP 0603 0.01UF 16V 10% X7R", PCB Package=0603, Tolerance=10%, Voltage=16V, Description in Visual="Cap SMT 0603 0.01UF 16V 10%  Cer X7R", Mount=SMT, P/N="CAP 0603 0.01UF 16V 10% X7R", Type="Ceramic X7R"
C4 C25 C26: library part CMP-011-000523-1, "Capacitor Surface Mount 0805 Footprint 4.7UF 16V 10% Tolerance Ceramic X7R", Manufacturer=Various, Manufacturer P/N="CAP 0805 4.7UF 16V 10% X7R", PCB Package=0805, Tolerance=10%, Voltage=16V, Description in Visual="Cap SMT 0805 4.7UF 16V 10%  Cer X7R", Mount=SMT, P/N="CAP 0805 4.7UF 16V 10% X7R", Type="Ceramic X7R"
C5 C6: library part CMP-011-000339-1, "Capacitor Surface Mount 0603 Footprint 47PF 50V 5% Tolerance Ceramic C0G", Manufacturer=Various, Manufacturer P/N="CAP 0603 47PF 50V 5% C0G", PCB Package=0603, Tolerance=5%, Voltage=50V, Description in Visual="Cap SMT 0603 47PF 50V 5%  Cer C0G", Mount=SMT, P/N="CAP 0603 47PF 50V 5% C0G", Type="Ceramic C0G"
C8 C16 C17 C18: library part CMP-011-000639-1, "Capacitor Surface Mount 1206 Footprint 10UF 16V 10% Tolerance Ceramic X7R", Manufacturer=Various, PCB Package=1206, Tolerance=10%, Voltage=16V, Description in Visual="Cap SMT 1206 10UF 16V 10%  Cer X7R", Manufacturer P/N="CAP 1206 10UF 16V 10% X7R", Mount=SMT, P/N="CAP 1206 10UF 16V 10% X7R", Type="Ceramic X7R"
C9: library part CMP-011-000660-3, "Capacitor Surface Mount 1206 Footprint 22UF 10V 10% Tolerance Ceramic X7R", Capacitor Type=Ceramic, Case/Package=1206, JLCPCB Part #=C5672, Manufacturer=Various, Tolerance=10%, Voltage=10V, Description in Visual="Cap SMT 1206 22UF 10V 10%  Cer X7R", Manufacturer P/N="CAP 1206 22UF 10V 10% X7R", Mount=SMT, P/N="CAP 1206 22UF 10V 10% X7R", PCB Package=1206, RoHS=Yes, Type="Ceramic X7R"
C10 C11: library part CMP-011-000479-1, "Capacitor Surface Mount 0805 Footprint 10UF 16V 20% Tolerance Ceramic X7R", Manufacturer=Various, Manufacturer P/N="CAP 0805 10UF 16V 20% X7R", PCB Package=0805, Tolerance=20%, Voltage=16V, Description in Visual="Cap SMT 0805 10UF 16V 20% Ceramic X7R", Mount=SMT, P/N="CAP 0805 10UF 16V 20% X7R", Type="Ceramic X7R"
C12 C24: library part CMP-011-000286-1, "Capacitor Surface Mount 0603 Footprint 1UF 16V 10% Tolerance Ceramic X7R", Manufacturer=Various, Manufacturer P/N="CAP 0603 1UF 16V 10% X7R", PCB Package=0603, Tolerance=10%, Voltage=16V, Description in Visual="Cap SMT 0603 1UF 16V 10% Ceramic X7R", Mount=SMT, P/N="CAP 0603 1UF 16V 10% X7R", Type="Ceramic X7R"
C13 C14: library part CMP-011-000283-1, "Capacitor Surface Mount 0603 Footprint 18PF 50V 5% Tolerance Ceramic C0G", Manufacturer=Various, Manufacturer P/N="CAP 0603 18PF 50V 5% C0G", PCB Package=0603, Tolerance=5%, Voltage=50V, Description in Visual="Cap SMT 0603 18PF 50V 5%  Cer C0G", Mount=SMT, P/N="CAP 0603 18PF 50V 5% C0G", Type="Ceramic C0G"
C19: library part CMP-011-000275-1, "Capacitor Surface Mount 0603 Footprint 1500PF 50V 10% Tolerance Ceramic X7R", Manufacturer=Various, PCB Package=0603, Tolerance=10%, Voltage=50V, Description in Visual="Cap SMT 0603 1500PF 50V 10%  Cer X7R", Manufacturer P/N="CAP 0603 1500PF 50V 10% X7R", Mount=SMT, P/N="CAP 0603 1500PF 50V 10% X7R", Type="Ceramic X7R"
C20 C21 C22 C23 C27 C28 C29: library part CMP-011-000329-1, "Capacitor Surface Mount 0603 Footprint 4.7UF 10V 10% Tolerance Ceramic X5R", Manufacturer=Various, PCB Package=0603, Tolerance=10%, Voltage=10V, Description in Visual="Cap SMT 0603 4.7UF 10V 10%  Cer X5R", Manufacturer P/N="CAP 0603 4.7UF 10V 10% X5R", Mount=SMT, P/N="CAP 0603 4.7UF 10V 10% X5R", Type="Ceramic X5R"
C31: library part CMP-011-000263-1, "Capacitor Surface Mount 0603 Footprint 10UF 16V 20% Tolerance Ceramic X5R", Manufacturer=Various, PCB Package=0603, Tolerance=20%, Voltage=16V, Description in Visual="Cap SMT 0603 10UF 16V 20% Ceramic X5R", Manufacturer P/N="CAP 0603 10UF 16V 20% X5R", Mount=SMT, P/N="CAP 0603 10UF 16V 20% X5R", Type="Ceramic X5R"
D1: library part CMP-00371-1, "Trans Voltage Suppressor Diode, 5.5V V(RWM), Unidirectional, 1 Element, Silicon", Case Connection=ANODE, Max Breakdown Voltage=9V, Min Breakdown Voltage=6V, Package Body Material=Plastic, Package Shape=Rectangular, Package Style="SMALL OUTLINEMeter", Peak Reflow Temperature (Cel)=260°C, Rep Pk Reverse Voltage-Max=5.5V, Time @ Peak Reflow Temperature-Max (s)=30s, Diode Element Material=SILICON, Diode Type="TRANS VOLTAGE SUPPRESSOR", JESD-30 Code=R-PDSO-G4, JESD-609 Code=e3, Moisture Sensitivity Level=1, Number of Elements=1, Pins=4, Polarity=Unidirectional, Reach SVHC Compliant=Yes, RoHS Compliant=Yes, Surface Mount=Yes, Technology=AVALANCHE, Terminal Finish=Tin, Terminal Form="Gull Wing", Terminal Position=DUAL
D3 D5: library part CMP-00026-00001-1, "Single Color LED, RED, 0805", Forward Voltage=2V, Test Current=20mA, RoHS Compliant=Yes
D4 D8: library part CMP-00038-3, "Single Color LED, Green, 0805", Forward Voltage=2V, Test Current=20mA, RoHS Compliant=Yes
DN1: library part CMP-00096-2, "Trans Voltage Suppressor Diode, 5V V(RWM), Bidirectional, 7 Element, Silicon with EMI Filter", Filter Type="DATA LINE FILTER", Reach SVHC Compliant=Yes, RoHS Compliant=Yes
DS1: library part CMP-2000-07415-1, "Full Color LED Lamp, Dominant Wavelength RGB 630 / 525 / 465 nm, -40 to 85 degC, 4-Pin THD, RoHS", Color=Red,Green,Blue(RGB), Current - Test=20mA, Manufacturer=Kingbright, Millicandela Rating=1300mcdRed,1700mcdGreen,900mcdBlue, Package / Case=Radial-4Leads, Package Description="4-Pin Through Hole LED, Dia 5.9 mm, Pitch 1.27 mm", Standard Package=500, Voltage - Forward (Vf) (Typ)=1.9VRed,3.3VGreen,3.3VBlue, 3D Model="WP154A4SUREQBFZGW.sldprt /  / WP154A4SUREQBFZGW.pro /  / WP154A4SUREQBFZGW.igs /  / WP154A4SUREQBFZGW.stp", Category=Optoelectronics, ComponentLink1Description="New link", Datasheet URL=https://www.kingbrightusa.com/images/catalog/spec/WP154A4SUREQBFZGC.pdf, Datasheet Version="Rev. 5A, 08/2014", Family=LEDIndication-Discrete, Height=8.60mm, Lens Style/Size=RoundwithDomedTop,5mm,T-13/4, Lens Type=Clear, Manufacturer URL=http://www.kingbright.com/, Mounting Technology=ThroughHole, Mounting Type=ThroughHole, Online Catalog=5mm,T-13/4(RGB)RoundwithDomedTopLEDLamp, Other Names="754-1615 / WP154A4SUREQBFZGC-ND", Package Reference=WP154A4SUREQBFZGC, Packaging=Bulk, Viewing Angle=50°, Wavelength - Dominant=630nm,525nm,465nm, Wavelength - Peak=645nm,515nm,460nm
FB1: library part CMP-00229-4, "Ferrite Chip 2000 mA 220 Ohms Differential Mode - Single 0805 Footprint", Current (mA)=2000, DC Resistance (ohms)=0.05, Frequency=100MHz, Impedance at Freq (ohms)=220Hz, Manufacturer=Murata, Operating Temperature Range="-55 to +125 °C", PCB Package=0805, ComponentLink1Description="Manufacturer Website", ComponentLink1URL=http://www.murata.com, ComponentLink2Description="Component Datasheet", ComponentLink2URL=http://search.murata.co.jp/Ceramy/image/img/PDF/ENG/L0110S0100BLM21P.pdf, ComponentLink3Description="Octopart Link", ComponentLink3URL=http://octopart.com/partsearch/#search/requestData&q=BLM21PG221SN1, Description in Visual="Ferrite SMT 2000mA 220Ohm Dif Mode 0805", Filter Type="Differential Mode - Single", Manufacturer P/N=BLM21PG221SN1, P/N=BLM21PG221SN1, Usage="Power Supply"
FD1 FD3 FD4: library part CMP-00085-3
FD2: library part CMP-00085-2
J1: library part CMP-00092-5, "Conn Micro USB 2.0 Type B RCP 5 POS 0.65mm Solder RA SMD 5 Terminal 1 Port T/R"
J2: library part CMP-002-000013-1, "10 Pin Shrouded Header, 0.050\", Key Pin 7", Manufacturer=Samtech, Manufacturer P/N=Various, ComponentLink1Description="Pinout Reference", ComponentLink1URL=http://infocenter.arm.com/help/topic/com.arm.doc.faqs/attached/13634/cortex_debug_connectors.pdf, ComponentLink2Description="Datasheet for Connector", ComponentLink2URL=http://suddendocs.samtec.com/catalog_english/ftsh_smt.pdf, Contact Finish=Gold, Description in Visual="10 Pin Shrouded Header, 0.050\", Key Pin 7", Gender=Male, Number of Contacts=10, Number of Rows=2, Orientation=Vertical, P/N="ARM Cortex Debug", Pitch="0.050\""
J3: library part CMP-00419-3, "WR-CRD Micro SD Card Connector Push & Push", Contact Resistance=100mOhm, Operating Temperature="-40 to +85degC", Rated Current=0.5A, Withstanding Voltage=500VAC, Working Voltage=30VAC, ComponentLink1Description=Manufacturer, ComponentLink1URL=http://www.we-online.de, ComponentLink2Description=Datasheet, ComponentLink2URL=https://katalog.we-online.com/em/datasheet/693071020811.pdf, Design Item ID=693071020811, Gender=Socket, Memory Card Type="Micro SD", Mounting Technology=SMT, Number of Contacts=8, Packaging="Tape and Reel", Part Number=693071020811, Pin Number=8, Published Date="November 2019", Publisher="Wurth Elektronik", Source=WR-CRD.SchLib, Type="Push & Push"
J4: library part CMP-00418-1, "Connector Header, PH Series, 2 Position, 2.00mm, 100V, Surface Mount, Solder, Pick and Place, Natural."
J15 J16: library part CMP-00385-1, "Board Connector, 3 Contact(s), 1 Row(s), Male, Right Angle, Solder Terminal, Black Insulator", Flammability Rating="UL94 V-0", Additional Feature=POLARIZED, Connector Type="BOARD CONNECTOR", Contact Finish - Mating="NOT SPECIFIED", Contact Finish - Termination=TIN, Contact Gender=Male, Contact Material=Brass, DIN Conformance=No, Filter Feature=No, IEC Conformance=No, JESD-609 Code=e3, Mating Information="MULTIPLE MATING PARTS AVAILABLE", MIL Conformance=No, Mixed Contacts=No, Mounting Style="RIGHT ANGLE", Mounting Technology=Board, Number of Contacts=3, Number of Rows Loaded=1, Option="General Purpose", Reach SVHC Compliant=Yes, RoHS Compliant=Yes, Terminal Pitch=2.54mm, Termination=Solder
J17: library part CMP-00384-1, "Board Connector, 2 Contact(s), 1 Row(s), Male, Right Angle, 0.1 inch Pitch, Solder Terminal, Latch, Black Insulator, Receptacle", Contact Resistance=15mR, Dielectric Withstanding Voltage (AC)=600V, Flammability Rating="UL94 V-0", Insulation Color=Black, Insulation Resistance=5GR, Max Operating Temperature=105°C, Min Operating Temperature=-65°C, Rated Current (Signal)=3A, Additional Feature=POLARIZED, Board Mounting Option="HOLE .125-.137", Body Breadth=0.275inch, Body Depth=0.535inch, Body Length=0.3inch, Body/Shell Style=RECEPTACLE, Connector Type="BOARD CONNECTOR", Contact Finish - Mating="NOT SPECIFIED", Contact Finish - Termination=TIN, Contact Gender=Male, Contact Material=Brass, Contact Pattern=RECTANGULAR, Contact Style="SQ PIN-SKT", DIN Conformance=No, Filter Feature=No, IEC Conformance=No, Insulation Material=Thermoplastic, JESD-609 Code=e3, Mating Contact Pitch=0.1inch, Mating Information="MULTIPLE MATING PARTS AVAILABLE", MIL Conformance=No, Mixed Contacts=No, Mounting Option 1=LATCH, Mounting Option 2=LOCKING, Mounting Style="RIGHT ANGLE", Mounting Technology=Board, Number Of Connectors=1, Number of Contacts=2, Number Of PCB Rows=1, Number of Rows Loaded=1, Option="General Purpose", PCB Contact Pattern=RECTANGULAR, Plating Thickness=15uin, Polarization Key="POLARIZED HOUSING", Reach SVHC Compliant=Yes, Reference Standard=UL, Reliability=COMMERCIAL, RoHS Compliant=Yes, Terminal Length=0.13inch, Terminal Pitch=2.54mm, Termination=Solder
J18 J19 J22: library part CMP-00105-2, "Board Connector, 4 Contact(s), 1 Row(s), Male, Straight, 0.1 inch Pitch, Solder Terminal, Locking, Black Insulator, Plug"
J20 J21: library part CMP-00108-1, "Board Connector, 6 Contact(s), 1 Row(s), Male, Straight, 0.1 inch Pitch, Solder Terminal, Locking, Black Insulator, Plug"
JP1 JP2 JP3 JP4 JP7 JP8 JP11 JP12 JP13 JP14 JP15 JP16 JP17 JP18 JP19 JP20 JP21 JP22 JP23 JP24 JP25 JP26 JP27: library part CMP-00422-2, "0O link, SMD, 0603, Solder Bridge Option", Manufacturer=Generic, Manufacturer P/N=Various, Component Type="Net Tie", Description in Visual="0O link, Solder Bridge/SMD, Open", Design Item ID="0603 link", P/N="0603 link", Pin Count=2, Source="Shunts and Jumpers.SchLib"
JP9 JP10: library part CMP-00423-2, "0O link, Solder Bridge/SMD, Open", Component Type="Standard (No BOM)", Description in Visual="0O link, Solder Bridge/SMD, Open", Design Item ID="0603 link (Open)", P/N="0603 link (Open)", Pin Count=2, Source="Shunts and Jumpers.SchLib"
L1: library part CMP-1353-00047-3, Ambient Temperature Range High=85°C, Ambient Temperature Range Low=-40°C, Case/Package=Nonstandard, Current Rating=8A, DC Resistance (DCR)=8.3mΩ, Frequency=54MHz, Inductance=1µH, Inductance Tolerance=20%, Max Operating Temperature=125°C, Saturation Current=14.7A, Series Resistance=10mΩ, Test Frequency=100kHz, Composition=Wirewound, Core Material="Composite, Ferrite", Depth=6.6mm, Height=2.8mm, Height - Seated (Max)=3.0988mm, Length=7.3mm, Max DC Current=8A, Min Operating Temperature=-40°C, Mount="Surface Mount", NexarPartId=22866635, Packaging="Tape & Reel (TR)", REACH SVHC=Unknown, RMS Current (Irms)=8A, RoHS=Compliant, Self Resonant Frequency=54MHz, Shielding=Shielded, Termination=SMD/SMT, Tolerance=20%, Width=6.6mm
L2: library part CMP-02424-000397-1, "Fixed Inductors Commercial Low DCR Series 1uH 7.5A 18.1mΩ 20%", Case/Package=2020, Current Rating=7.5A, DC Resistance (DCR)=18.1mR, Inductance=1uH, Inductance Tolerance=20%, Max DC Current=7A, Max Operating Temperature=125°C, Min Operating Temperature=-55°C, Package Quantity=2000, Self Resonant Frequency=1MHz, Test Frequency=100kHz, Contact Plating=Tin, Depth=5.43mm, Height=2mm, Height - Seated (Max)=0.079inch, Lead Free="Lead Free", Length=5.74mm, Military Standard=Not, Mount="Surface Mount", Packaging="Tape and Reel", Radiation Hardening=No, RMS Current (Irms)=7.5A, Saturation Current=7A, Shielding=Shielded, Termination=SMD/SMT, Tolerance=20%, Width=0.204inch
LS1: library part CMP-000049-2, "8 Ohms General Purpose Speaker 100 mW 500 Hz ~ 20 kHz Top Round"
Q2: library part CMP-00278-84408871-1, "2N4401TF Transistor General Purpose BJT NPN 40 Volt 0.6 Amp 3-Pin TO-92 Tape And Reel", Case/Package=TO-92, Collector Base Voltage (VCBO)=60V, Collector Emitter Breakdown Voltage=40V, Collector Emitter Saturation Voltage=400mV, Current Rating=600mA, Emitter Base Voltage (VEBO)=6V, Frequency=250MHz, Manufacturer Lifecycle Status=ACTIVE, Max Junction Temperature (Tj)=150°C, Max Power Dissipation=625mW, Min Operating Temperature=-55°C, Collector Emitter Voltage (VCEO)=40V, Element Configuration=Single, Gain Bandwidth Product=250MHz, Height=5.33mm, hFE Min=100, Lead Free="Lead Free", Length=5.2mm, Lifecycle Status=Production, Max Breakdown Voltage=40V, Max Collector Current=600mA, Max Frequency=250MHz, Max Operating Temperature=150°C, Mount="Through Hole", NexarPartId=84408871, Number of Elements=1, Number of Pins=3, Packaging="Tape and Reel", Polarity=NPN, Power Dissipation=625mW, Radiation Hardening=No, REACH SVHC="No SVHC", RoHS=Compliant, Schedule B="8541210080, 8541210080", Transition Frequency=250MHz, Voltage Rating (DC)=40V, Weight=240mg, Width=4.19mm
R1 R2: library part CMP-005-002764-2, "Resistor Surface Mount, 27 Ohms, 0603 Footprint, 1% Tolerance 0.1W", Manufacturer=Various, Manufacturer P/N="RES 0603 27R 1%", PCB Package=0603, Power Rating=0.1W, Tolerance=1%, Description in Visual="Res SMT 27 0603  1%  0.1W", Mount=SMT
R3 R5 R6 R7 R8 R9 R18 R19: library part CMP-005-002503-3, "Resistor Surface Mount, 1K Ohms, 0603 Footprint, 1% Tolerance 0.1W", JLCPCB Part #=C21190, Manufacturer=Various, PCB Package=0603, Power Rating=0.1W, Tolerance=1%, Description in Visual="Res SMT 1K 0603  1%  0.1W", Manufacturer P/N="RES 0603 1K 1%", Mount=SMT
R4: library part CMP-005-002436-2, "Resistor Surface Mount, 178K Ohms, 0603 Footprint, 1% Tolerance 0.1W", Manufacturer=Various, PCB Package=0603, Power Rating=0.1W, Tolerance=1%, Description in Visual="Res SMT 178K 0603  1%  0.1W", Manufacturer P/N="RES 0603 178K 1%", Mount=SMT
R11: library part CMP-005-002156-3, "Resistor Surface Mount, 10K Ohms, 0603 Footprint, 1% Tolerance 0.1W", JLCPCB Part #=C25804, Manufacturer=Various, PCB Package=0603, Power Rating=0.1W, Tolerance=1%, Description in Visual="Res SMT 10K 0603  1%  0.1W", Manufacturer P/N="RES 0603 10K 1%", Mount=SMT
R12: library part CMP-005-002125-2, "Resistor Surface Mount, 100 Ohms, 0603 Footprint, 1% Tolerance 0.1W", Manufacturer=Various, Manufacturer P/N="RES 0603 100R 1%", PCB Package=0603, Power Rating=0.1W, Tolerance=1%, Description in Visual="Res SMT 100 0603  1%  0.1W", Mount=SMT
R13 R14: library part CMP-005-005142-2, "Resistor Surface Mount, 470 Ohms, 0805 Footprint, 1% Tolerance 0.125W", Manufacturer=Various, Manufacturer P/N="RES 0805 470R 1%", PCB Package=0805, Power Rating=0.125W, Tolerance=1%, Description in Visual="Res SMT 470 0805  1%  0.125W", Mount=SMT
R15: library part CMP-005-005139-2, "Resistor Surface Mount, 47.5K Ohms, 0805 Footprint, 0.1% Tolerance 0.125W", Manufacturer=Various, PCB Package=0805, Power Rating=0.125W, Tolerance=0.1%, Description in Visual="Res SMT 47.5K 0805  0.1%  0.125W", Manufacturer P/N="RES 0805 47.5K 0.1%", Mount=SMT
R20 R21: library part CMP-005-001984-2, "Resistor Surface Mount, 1.13K Ohms, 0603 Footprint, 1% Tolerance 0.1W", Manufacturer=Various, PCB Package=0603, Power Rating=0.1W, Tolerance=1%, Description in Visual="Res SMT 1.13K 0603  1%  0.1W", Manufacturer P/N="RES 0603 1.13K 1%", Mount=SMT
SW1: library part CMP-00084-3, "Keypad Switch, 1 Switches, SPST, Momentary tactile button, 0.05A, 16VDC, 3.23N, Solder Terminal, Surface Mount-straight", Actuator Color=White, Contact Resistance=0.5mR, Dielectric Withstand Volts=250VACV, Insulation Resistance=100MR, Manufacturer Series=PTS810, Max Operating Temperature=85°C, Min Operating Temperature=-40°C, Actuator Length=0.028inch, Actuator Travel=0.1524mm, Actuator Type=Pushbutton, Circuit=SPST, Electrical Life=50000Cycles, JESD-609 Code=e4, Mounting Technology="Surface Mount", Reach SVHC Compliant=Yes, RoHS Compliant=Yes, Solderability=REFLOW, Switch Action=MOMENTARY, Switch Function=OFF-MOM, Switch Type=Keypad, Terminal Finish=Silver, Termination=Solder, Type=Tactile
TP1 TP2 TP3 TP4 TP5 TP6 TP7 TP8 TP9 TP10 TP11 TP12 TP13 TP14 TP15 TP16 TP18 TP19 TP20 TP21 TP22: library part CMP-00049-4, "Test Pad/Point (Testpoint, Testpad), for probing"
U1: library part CMP-00104-3, "USB Bridge, USB to UART USB 2.0 UART Interface 12-DFN (3x3)", Case/Package=HTSON, Max Operating Temperature=85°C, Max Supply Voltage=5.5V, Min Operating Temperature=-40°C, Min Supply Voltage=2.97V, Nominal Supply Voltage=5V, Package Body Material=Plastic, Package Shape=Square, Package Style="SMALL OUTLINE, HEAT SINK/SLUG, THIN PROFILEMeter", Peak Reflow Temperature (Cel)=260°C, Power Supplies=1.8/3.3,3.3/5V, Temperature Grade=INDUSTRIAL, Time @ Peak Reflow Temperature-Max (s)=40s, Length=3mm, Moisture Sensitivity Level=3, Pins=12, Qualification Status="Not Qualified", Reach SVHC Compliant=Yes, RoHS Compliant=Yes, Surface Mount=Yes, Technology=CMOS, Terminal Form="No Lead", Terminal Pitch=0.45mm, Terminal Position=DUAL, Width=3mm
U2: library part CMP-00080-5, "Power Supply Support Circuit, Adjustable, 1 Channel, 6.6, PQCC16", Case/Package=HVQCCN, Max Operating Temperature=85°C, Max Supply Voltage=26V, Min Operating Temperature=-40°C, Min Supply Voltage=4.35V, Nominal Supply Voltage=5V, Package Body Material=Plastic, Package Equivalence Code=LCC16,.12SQ,20, Package Shape=Square, Package Style="CHIP CARRIER, HEAT SINK/SLUG, VERY THIN PROFILEMeter", Peak Reflow Temperature (Cel)=260°C, Power Supplies=4.5/6.3V, Supply Current-Max (Isup)=1.5mA, Temperature Grade=INDUSTRIAL, Adjustable Threshold=Yes, Channels=1, Height - Seated (Max)=1mm, JESD-30 Code=S-PQCC-N16, JESD-609 Code=e4, Length=3mm, Moisture Sensitivity Level=2, Number of Channels=1, Pins=16, Qualification Status="Not Qualified", Reach SVHC Compliant=Yes, RoHS Compliant=Yes, Surface Mount=Yes, Terminal Finish=Nickel, Terminal Form="No Lead", Terminal Pitch=0.5mm, Terminal Position=QUAD, Throw Configuration="POWER SUPPLY SUPPORT CIRCUIT", Width=3mm
U3: library part CMP-00071-2, "WiFi 802.11b/g/n Transceiver Module 2.412GHz ~ 2.484GHz Integrated, Trace Surface Mount, Integrated SAMD21 Cortex M0+"
U4: library part CMP-0323-00344-3, "Buck Step Down Regulator with 2.3 to 6 V Input and 3.3 V Output, -40 to 85 degC, 8-Pin WSON (DSG), Green (RoHS & no Sb/Br)", Manufacturer="Texas Instruments", Rating=Catalog, Switch Current Limit(Typ)(A)=2.4, Code_JEDEC=MO-229, ComponentLink1Description=Datasheet, ComponentLink1URL=http://www.ti.com/general/docs/lit/getliterature.tsp?genericPartNumber=TPS62082&fileType=pdf, ComponentLink2Description="Package Specification", ComponentLink2URL=http://www.ti.com/litv/pdf/mpds308a, ComponentLink3Description="URL Link1", ComponentLink3URL="Samples URL:http://www.ti.com/product/tps62082#samples", DatasheetVersion=SLVSAE8B, Duty Cycle(Max)(%)=100, Eco-Plan="Green (RoHS & no Sb/Br)", Iout(Max)(A)=1.2, Iq(Typ)(mA)=0.006, Mounting Technology="Surface Mount", PackageDescription="8-Pin Plastic Small Outline No-Lead, 2 x 2 x 0.8 mm Body, 0.5 mm Pitch, Exposed Pad", PackageReference=DSG0008A, PackageVersion="revB, Oct-2010", PartNumber=TPS62082DSGR, Regulated Outputs(#)=1, SubFamily="Step-Down Regulator", Topology=Buck, Vin(Max)(V)=6, Vin(Min)(V)=2.3, Vout(Max)(V)=3.3, Vout(Min)(V)=3.3
U5: library part CMP-04918-000377-1, "IC REG BOOST 5V 4A 10VSON", Max Input Voltage=5.5V, Max Operating Temperature=85°C, Max Output Current=2.1A, Min Input Voltage=2.3V, Min Operating Temperature=-40°C, Output Voltage=5V, Quiescent Current=35uA, Switching Frequency=2MHz, Contact Plating=Gold, Efficiency=96%, Lead Free="Lead Free", Mount="Surface Mount", Number of Outputs=1, Number of Pins=10, Operating Supply Voltage=5.5V, Output Type=Fixed, RoHS Compliant=Yes, Topology=Boost
X1: library part CMP-0447-00001-4, "Crystal 32.768kHz ±20ppm (Tol) 12.5pF FUND 70kΩ 2-Pin CSMD T/R", Case/Package=CSMD, ESR (Equivalent Series Resistance)=70kR, Frequency=32.768kHz, Frequency Tolerance=20ppm, Load Capacitance=12.5pF, Max Operating Temperature=85°C, Min Operating Temperature=-40°C, Operating Frequency="32.768 kHz", Package Quantity=3000, Depth=1.5mm, Height=0.9mm, Lead Free="Lead Free", Length=3.2mm, Number of Pins=2, Packaging="Tape and Reel", Radiation Hardening=No, REACH SVHC="No SVHC", RoHS Compliant=Yes, Series=ABS07, Series Resistance=70kR, Termination=SMD/SMT, Tolerance=20ppm, Width=1.5mm

## Free pads (board coordinates)
  round 63.94 hole 50: 4(95,2455) 5(85,85) 6(3130,925)

## Via types
v1: diameter 20, hole 8, Top Layer to Bottom Layer, 350 vias
v2: diameter 19.68, hole 7.87, Top Layer to Bottom Layer, 13 vias
v3: diameter 20, hole 8, Top Layer to Bottom Layer, tented both sides, 2 vias

## Nets (pads, with @x,y where several pads share a name; then routed paths per layer and width w, separated by ;. In a path a pad name is that pad's centre, name@x,y a point inside that pad or via, vN(x,y) a via of type N, cw(c..) or ccw(c..) an arc to the next point about the centre after c; other vN are vias at no path point)
3V3: C10.2 C11.1 C15.2 DN1.4 DN1.5 DN1.13 J2.1 J3.4 J17.2 J18.2 JP22.2 R7.2 R11.2 TP6.1 TP11.1 U3.7 U3.21 | length 8016